# EAGLE board M5StickCplus (EAGLE 9.6.2)
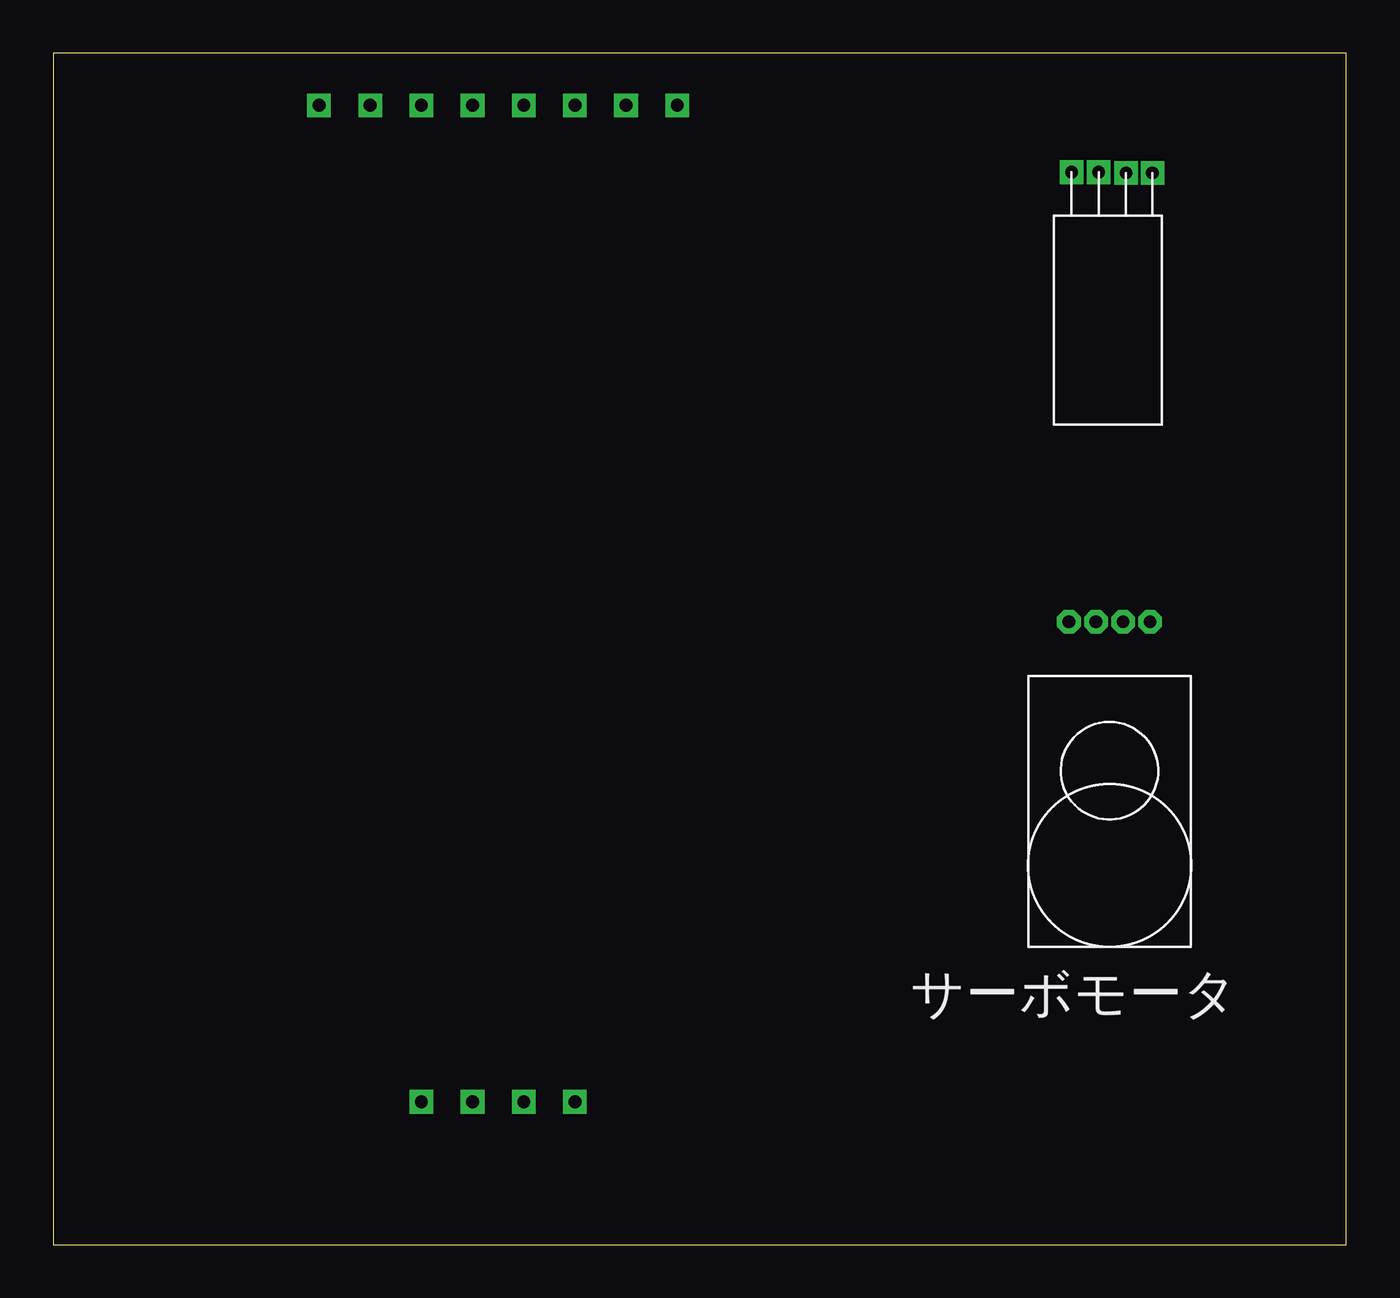
[diagram p0: board, top side]
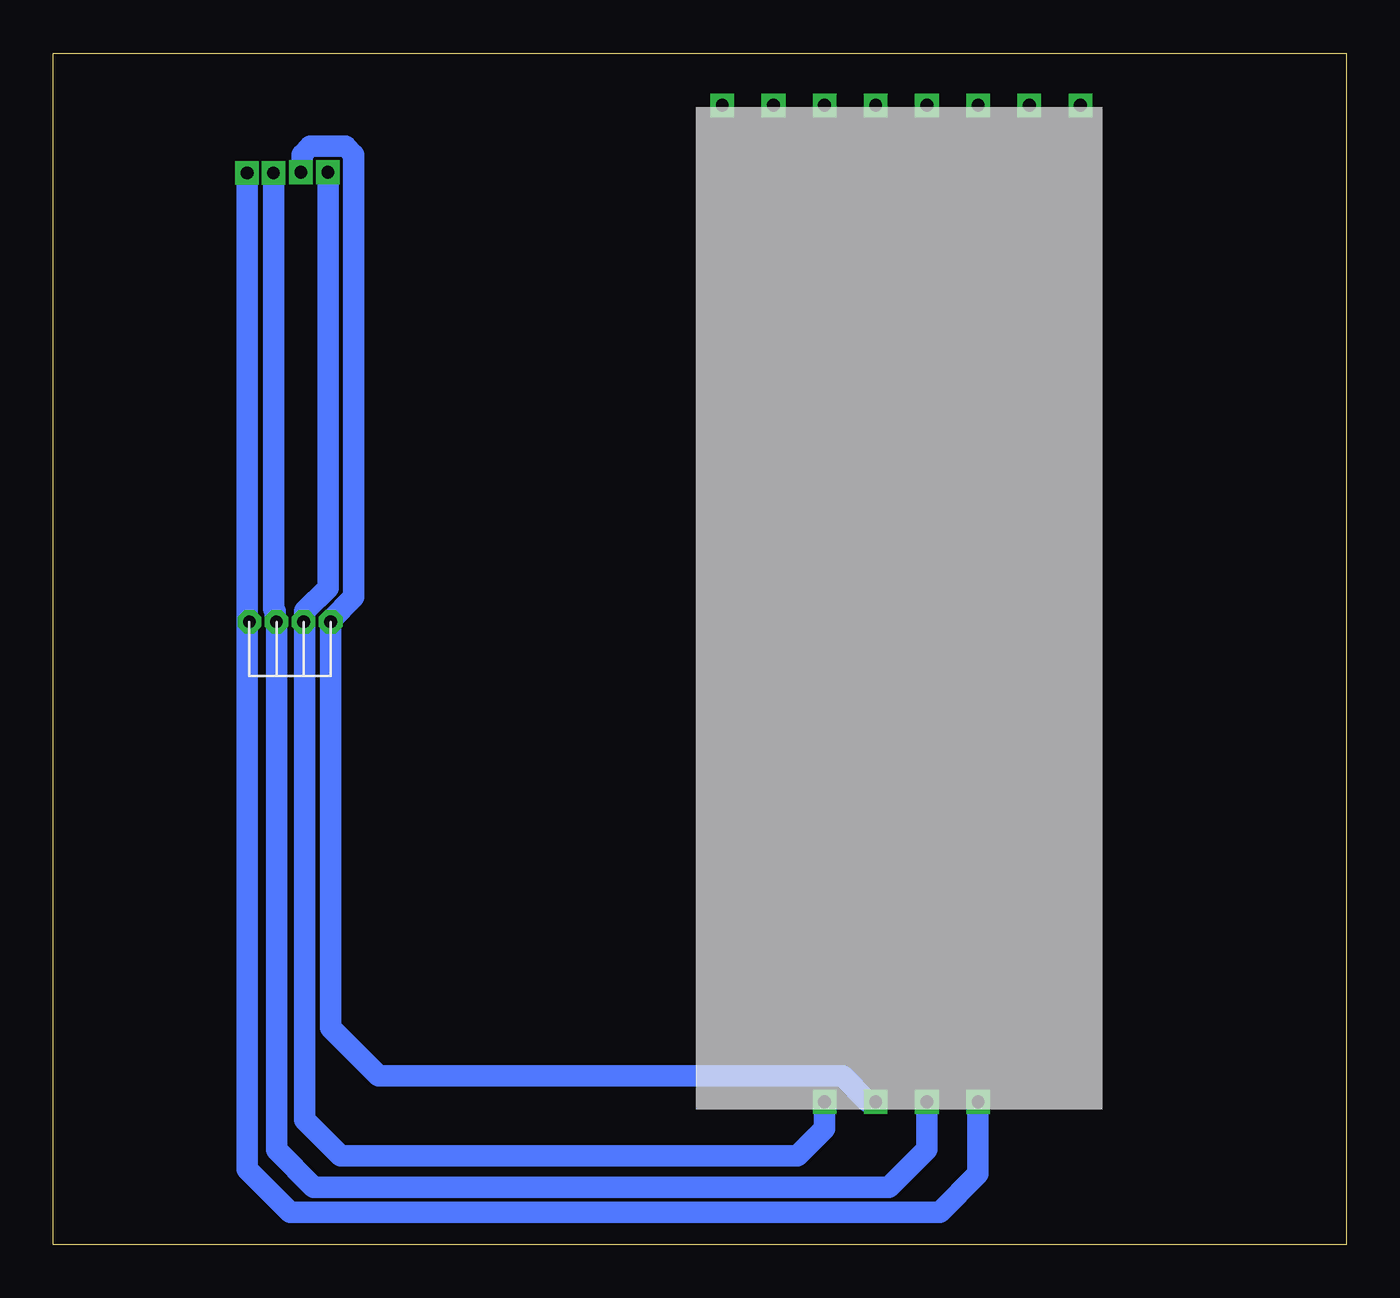
[diagram p1: board, bottom side, seen from below]

Size 60.63 x 55.87 mm. Coordinates in mm from the lower left corner, seen from the top.
Outline: 0,0 60.63,0 60.63,55.87 0,55.87 0,0
Copper layers (1*16): Top 0.035mm / dielectric 1.5mm / Bottom 0.035mm
Design rules "default": minimum track width 6mil, minimum drill 0.35mm, track to track 6mil, track to pad 6mil, pad to pad 6mil, via to via 6mil, smd to smd 6mil, copper to edge 40mil, drill to drill 6mil, minimum pad ring 10mil, minimum via ring 8mil, stop-mask expansion 4mil, vias tented up to drill 0mil, thermal gap 10mil

## Footprints (pad centres in the part's own frame; a part is rotated, then mirrored left to right if it is on the bottom)
FT1117M = drill 0.6 octagon: 5V -0.635,-2.54; GND -1.905,-2.54; NC 0.635,-2.54; SIGNAL 1.905,-2.54
M5STICK = drill 0.6 square: 3V3 105.6,-1329.6; 5VIN 108,-1329.6; 5VOUT 93.6,-1329.6; BAT 103.2,-1329.6; G26 96,-1329.6; G32 100.8,-1376.33; G33 103.2,-1376.33; G36/G25 98.4,-1329.6; GND 91.2,-1329.6; GND1 96,-1376.33; GO 100.8,-1329.6; VOUT 98.4,-1376.33
TECONNECTIVITY1005447-1 = drill 0.6 square: P$1 -2.016,-2; P$2 -0.778,-2; P$3 0.508,-2.032; P$4 1.778,-2.032

## Placement (x,y rotation side)
U$1  FT1117M  [FT1117M]  49.53,26.67 180 top
U$2  M5STICKCPLUS  [M5STICK]  -78.74,1383.03 0 top
U$3  [TECONNECTIVITY1005447-1]  49.53,48.26 180 top

## Library data of the parts
U$1 = FT1117M
U$2 = M5stickcPlus
U$3 = TE Connectivity 1005447-1

## Nets
N$1: U$1.GND U$2.GND1 U$3.P$1
N$2: U$1.5V U$2.VOUT U$3.P$2
N$3: U$1.NC U$2.G33 U$3.P$4
N$4: U$1.SIGNAL U$2.G32 U$3.P$3

## Tracks (layer width: path | path; a pad name or v marks a point on that pad's centre or on a via)
N$1
  Bottom 1.016: U$3.P$1 51.55,29.32 | 51.55,29.32 U$1.GND | U$2.GND1 17.26,3.31 19.05,1.52 49.53,1.52 51.55,3.54 51.55,29.32
N$2
  Bottom 1.016: U$3.P$2 50.31,29.8 50.22,29.71 50.22,29.27 U$1.5V 50.17,4.45 48.41,2.69 21.44,2.69 19.66,4.47 U$2.VOUT
N$3
  Bottom 1.016: U$3.P$4 47.75,30.8 48.84,29.71 48.84,29.27 U$1.NC 48.84,29.15 48.84,5.85 47.15,4.16 25.73,4.16 24.46,5.43 U$2.G33
N$4
  Bottom 1.016: U$3.P$3 48.97,50.35 48.97,51.12 48.58,51.51 46.92,51.51 46.54,51.12 46.54,30.36 47.62,29.27 U$1.SIGNAL 47.62,10.16 45.38,7.91 23.63,7.91 22.42,6.7 U$2.G32